# EAGLE board Final_PCB (EAGLE 9.7.0), part 1 of 6
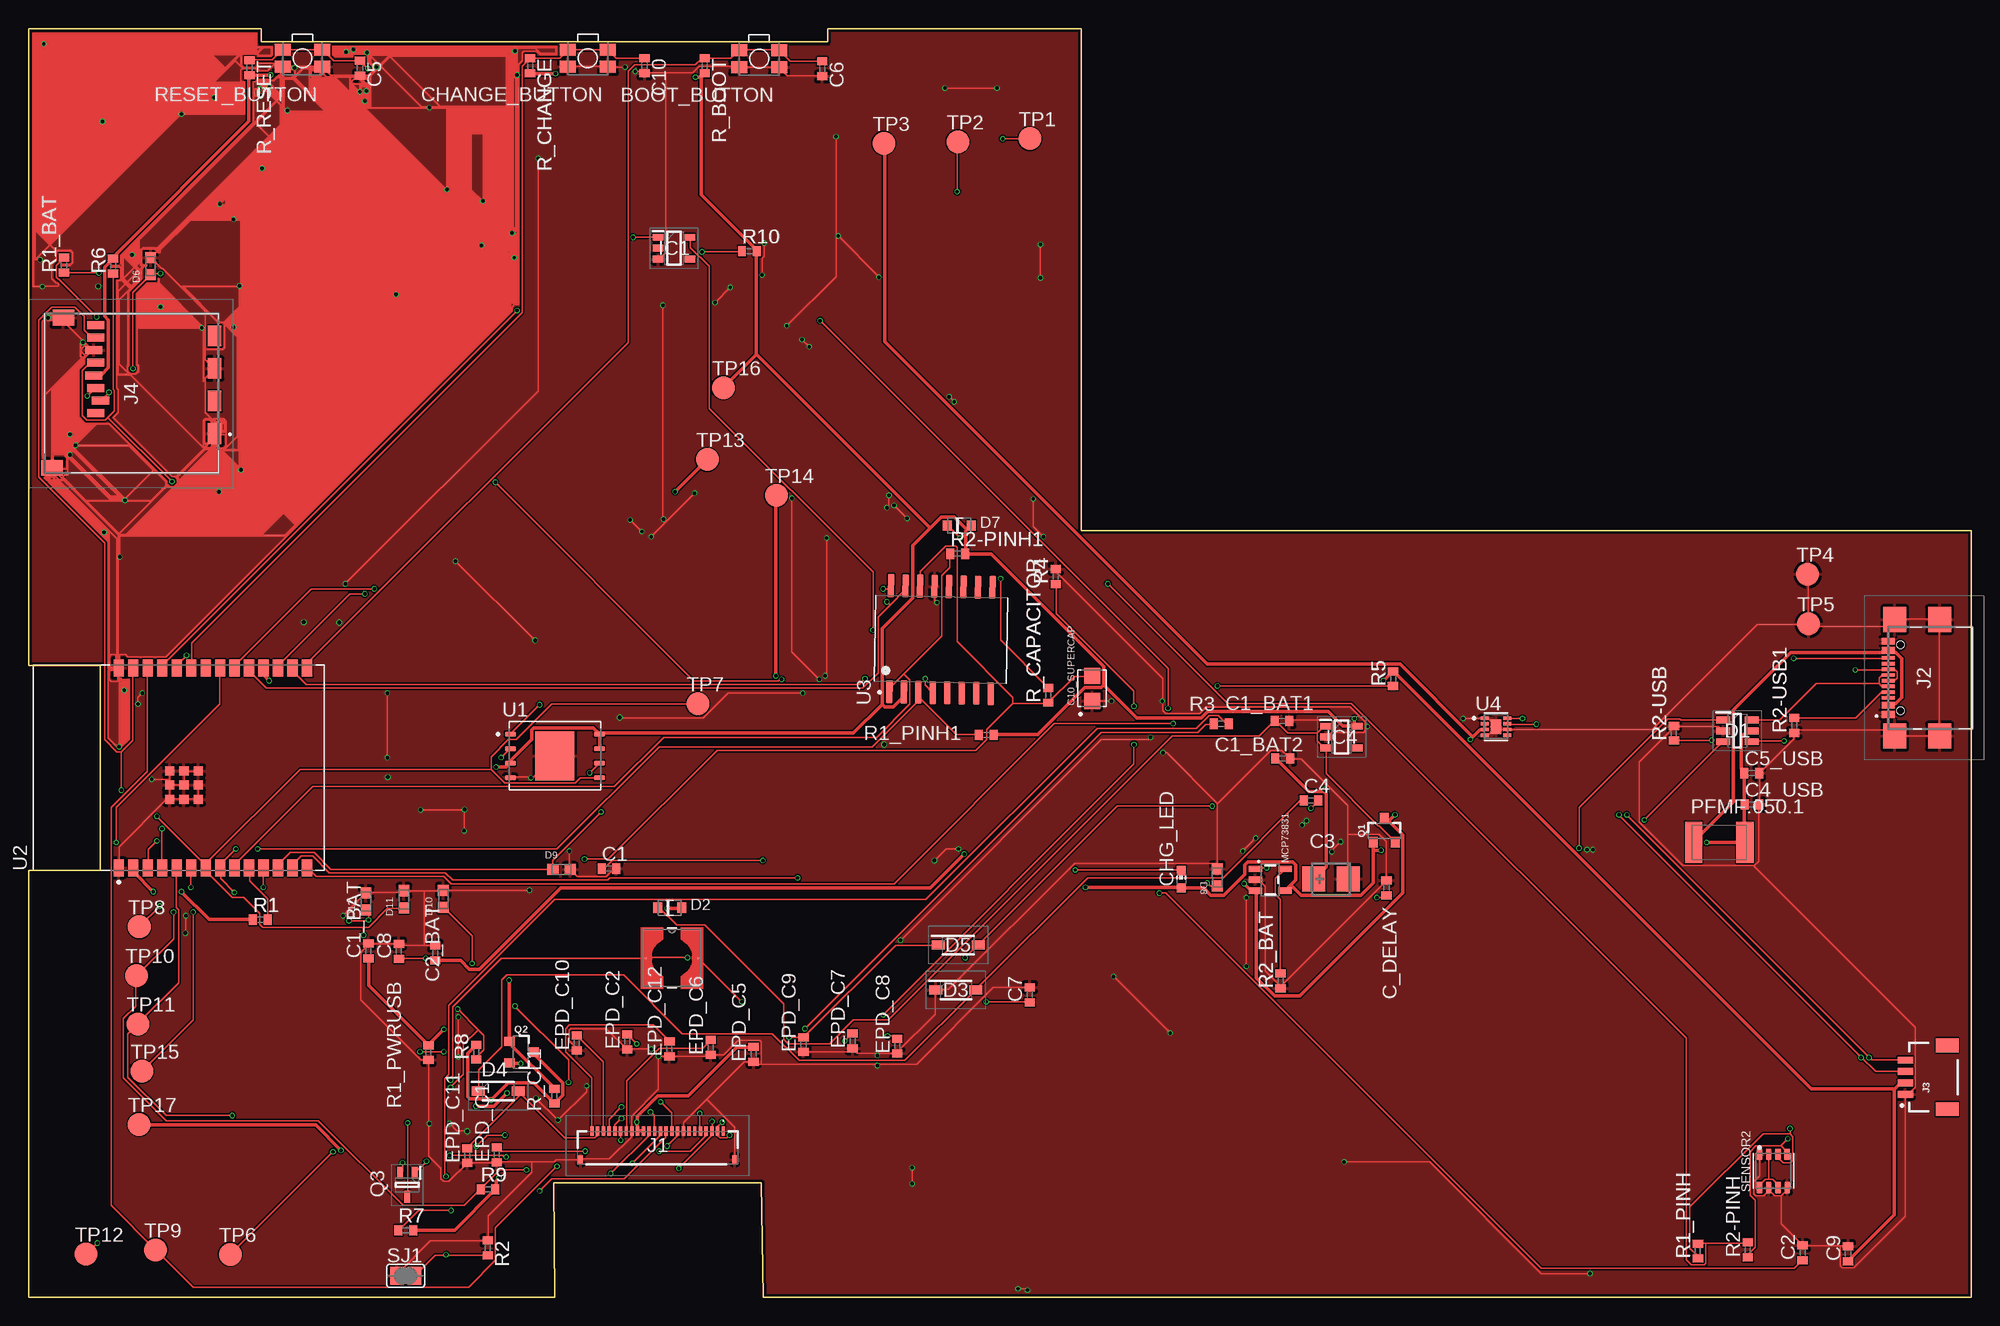
[diagram p0: board, top side]
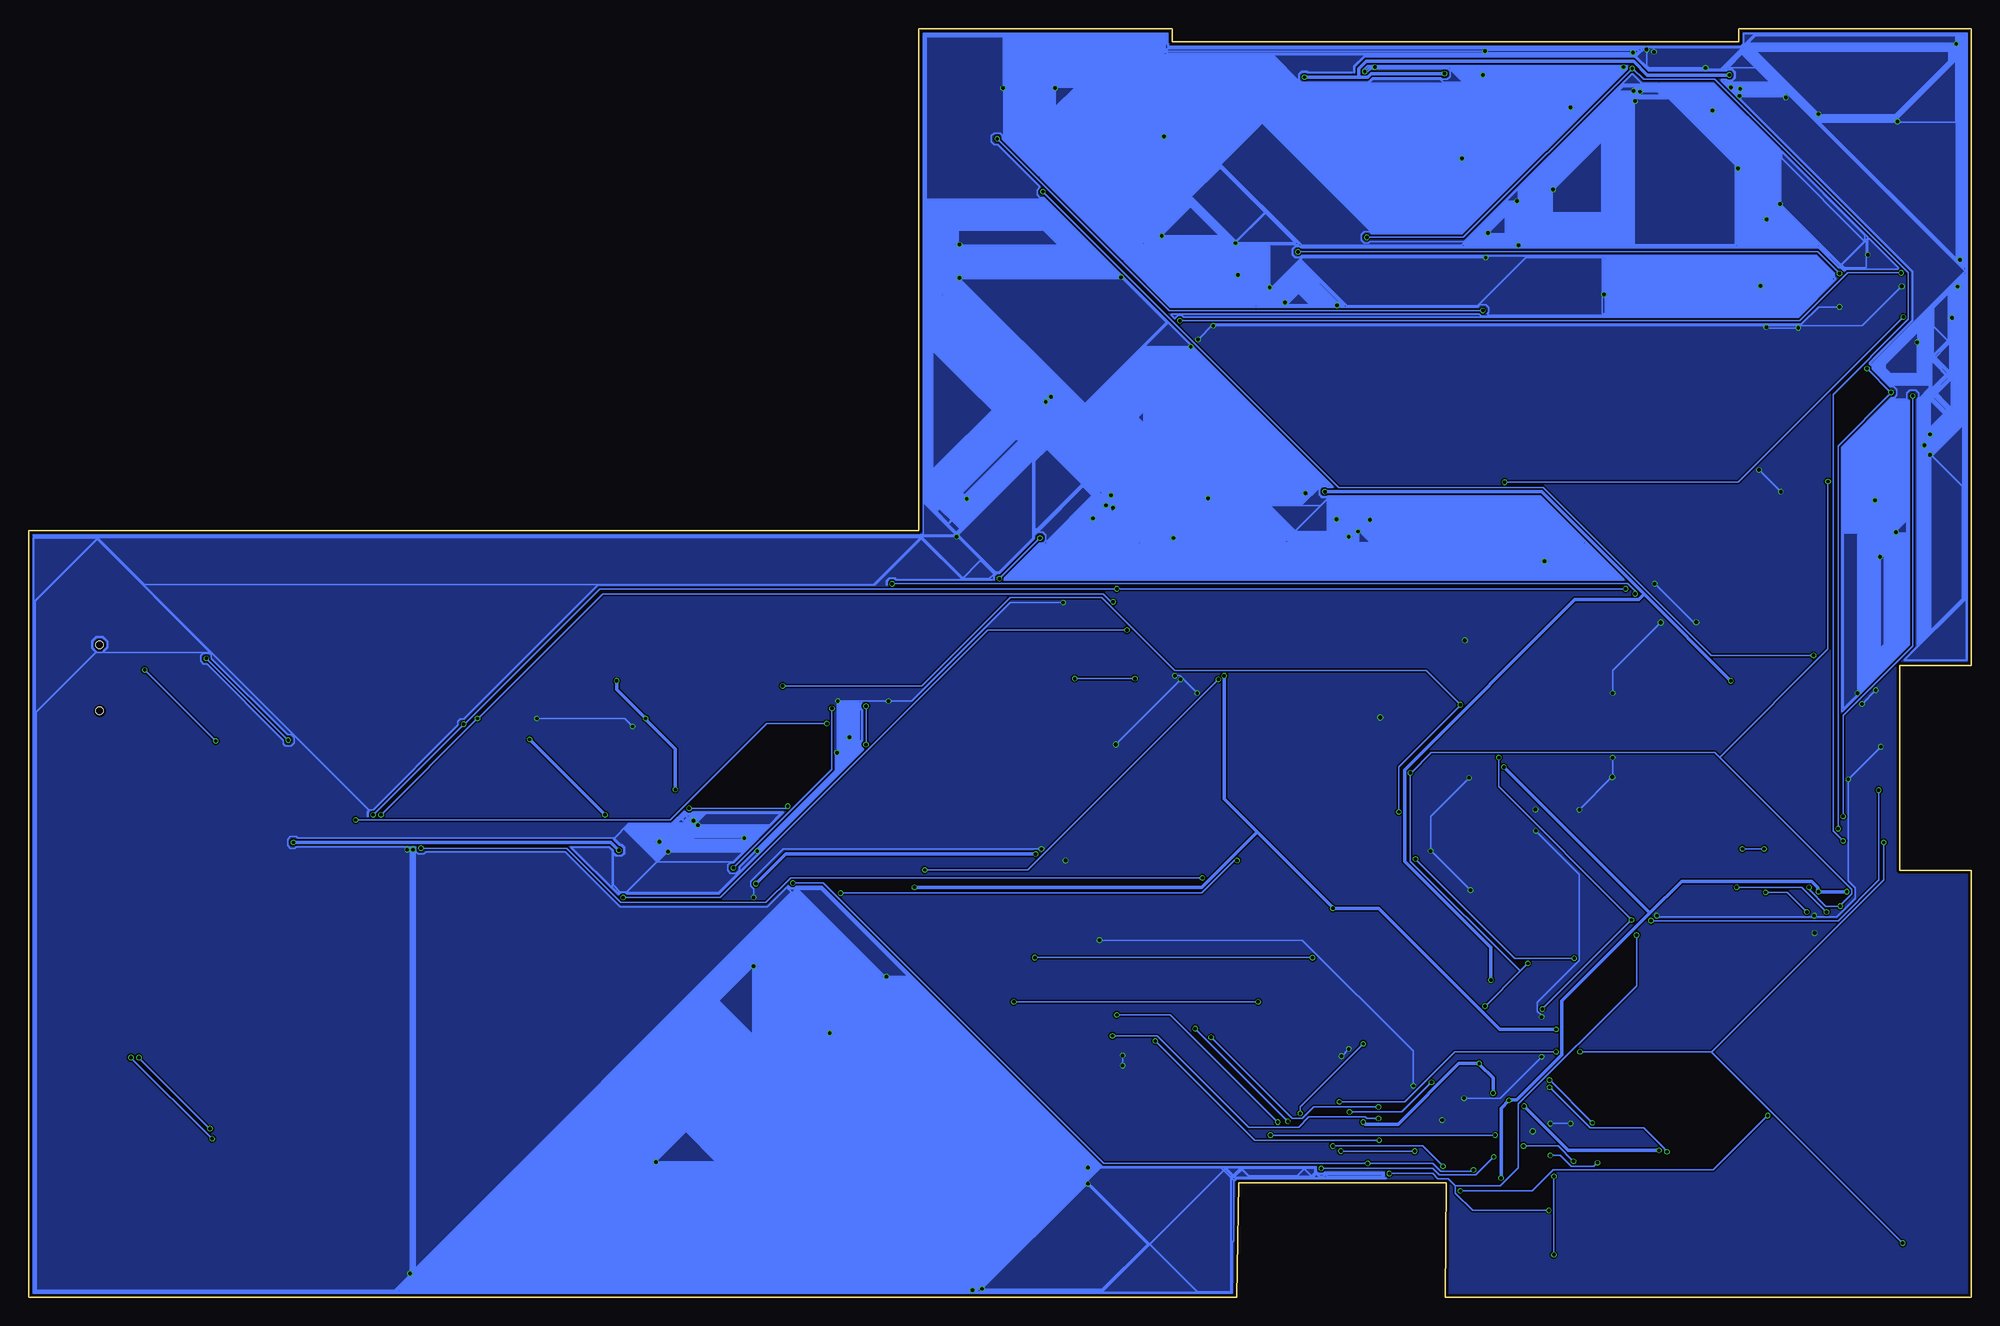
[diagram p1: board, bottom side, seen from below]

Size 170.2 x 111.2 mm. Coordinates in mm from the lower left corner, seen from the top.
Outline: 0,111.2 0,55.4 6.3,55.4 6.3,37.41 0,37.41 0,0 46.09,0 46,10.03 64.2,10.03 64.38,0 170.2,0 170.2,67.2 92.2,67.2 92.2,111.2 70.01,111.2 70.01,110.03 20.4,110.03 20.4,111.2 0,111.2
Copper layers (1*16): Top 0.035mm / dielectric 1.6mm / Bottom 0.035mm
Design rules "jlcpcb-2layers.dru": minimum track width 5mil, minimum drill 0.3mm, track to track 5mil, track to pad 5mil, pad to pad 5mil, via to via 5mil, smd to smd 5mil, copper to edge 0.2mm, drill to drill 6mil, minimum pad ring 10mil, minimum via ring 3mil, stop-mask expansion 4mil, vias tented up to drill 0mil, thermal gap 10mil
Net classes: 1 Power: width 0.3 mm; 2 Rest: width 0.15 mm

## Footprints (pad centres in the part's own frame; a part is rotated, then mirrored left to right if it is on the bottom)
MYBUTTON = smd 1.4 x 1.05: 1 1.75,0.75; 2 -1.75,0.75; 3 -1.75,-0.75; 4 1.75,-0.75
ESP32_WROVER_EAGLE-LTSPICE_C0402 = smd 0.7 x 0.9: 1 -0.65,0; 2 0.65,0
RCL_CT3528 = smd 2 x 2.2: + -1.5,0; - 1.5,0
EAGLE-LTSPICE_C0402 = smd 0.7 x 0.9: 1 -0.65,0; 2 0.65,0
CAPCP3225X100N = smd 1.4 x 1.4: 1 -1.1,0; 2 1.1,0
ADAFRUIT_CHIP-LED0603 = smd 0.8 x 0.8: A 0,-0.75; C 0,0.75
SOT95P280X145-6N = smd 1.2 x 0.6: 1 -1.25,0.95; 2 -1.25,0; 3 -1.25,-0.95; 4 1.25,-0.95; 5 1.25,0; 6 1.25,0.95
ESP32_WROVER_AVX---SD0805S020S1R0_AVX_SD0805S020S1R0_0 = smd 0.8 x 0.9: 1 -1.05,0; 2 1.05,0
SOD3716X135N = smd 1.15 x 0.8: 1 -1.75,0; 2 1.75,0
DIOC1608X36N = smd 0.97 x 0.94: 1 -0.75,0; 2 0.75,0
SOT95P280X125-5N = smd 0.9 x 0.6: 1 -1.4,0.95; 2 -1.4,0; 3 -1.4,-0.95; 4 1.4,-0.95; 5 1.4,0.95
SOT95P280X120-5N = smd 0.9 x 0.6: 1 -1.4,0.95; 2 -1.4,0; 3 -1.4,-0.95; 4 1.4,-0.95; 5 1.4,0.95
FH34SRJ24S05SH99 = smd 0.3 x 0.8: 1 5.75,1.45; 2 5.25,1.45; 3 4.75,1.45; 4 4.25,1.45; 5 3.75,1.45; 6 3.25,1.45; 7 2.75,1.45; 8 2.25,1.45; 9 1.75,1.45; 10 1.25,1.45; 11 0.75,1.45; 12 0.25,1.45; 13 -0.25,1.45; 14 -0.75,1.45; 15 -1.25,1.45; 16 -1.75,1.45; 17 -2.25,1.45; 18 -2.75,1.45; 19 -3.25,1.45; 20 -3.75,1.45; 21 -4.25,1.45; 22 -4.75,1.45; 23 -5.25,1.45; 24 -5.75,1.45 | smd 0.4 x 0.8: MP1 6.75,-1.05; MP2 -6.75,-1.05
SAMACSYS_PARTS_USB4110GFA = smd 0.3 x 1.15: A1 -3.35,3.678; A4 -2.55,3.678; A5 -1.25,3.678; A6 -0.25,3.678; A7 0.25,3.678; A8 1.25,3.678; A9 2.55,3.678; A12 3.35,3.678; B1 3.05,3.678; B4 2.25,3.678; B5 1.75,3.678; B6 0.75,3.678; B7 -0.75,3.678; B8 -1.75,3.678; B9 -2.25,3.678; B12 -3.05,3.678 | smd 2.18 x 2: MP1 -5.11,-0.827; MP2 5.11,-0.827; MP3 -5.11,3.103; MP4 5.11,3.103 | hole 0.65: -2.89,2.603; 2.89,2.603
JST04_1MM_RA = smd 0.6 x 1.35: 1 -1.5,0; 2 -0.5,0; 3 0.5,0; 4 1.5,0 | smd 1.2 x 2: NC1 2.8,-3.675; NC2 -2.8,-3.675
112ATAARR03ATTEND = smd 1.8 x 1.2: G1 10.6,10.4; G2 4.9,10.4; S1 7.75,10.4; S2 2.05,10.4 | smd 1.4 x 1.9: G3 13.6,-3.85; G4 0.45,-2.85 | smd 0.7 x 1.5: P1 8.8,0; P2 7.7,0.4; P3 6.6,0; P4 5.5,-0.2; P5 4.4,0; P6 3.3,-0.2; P7 2.2,0; P8 1.1,0
IND_4828-WE-TPC_WRE = smd 0.127 x 0.127: 1 -2.286,0; 2 2.286,0
ESP32_WROVER_SPARKFUN-IC-POWER_SOT23-5 = smd 0.55 x 1.2: 1 -0.95,-1.3; 2 0,-1.3; 3 0.95,-1.3; 4 0.95,1.3; 5 -0.95,1.3
ESP32C6_VARISTOR_CT/CN1812 = smd 1.5 x 3.6: 1 -2.25,0; 2 2.25,0
ESP32_WROVER_SPARKFUN-DISCRETESEMI_SOT23-3 = smd 0.8 x 0.9: 1 -0.95,-1; 2 0.95,-1; 3 0,1.1
SOT65P210X110-3N = smd 1.05 x 0.5: 1 -1.05,0.65; 2 -1.05,-0.65; 3 1.05,0
ESP32_WROVER_EAGLE-LTSPICE_R0402 = smd 0.7 x 0.9: 1 -0.65,0; 2 0.65,0
ESP32_WROVER_BME680_PSON80P300X300X100-8N = smd 1.016 x 0.5: 1 1.458,1.2; 2 1.458,0.4; 3 1.458,-0.4; 4 1.458,-1.2; 5 -1.458,-1.22; 6 -1.458,-0.4; 7 -1.458,0.4; 8 -1.458,1.2
SJ = smd 1.168 x 1.6: 1 -0.762,0; 2 0.762,0
TP20R = smd 2 x 2: TP 0,0
SON127P600X800X80-9N = smd 0.94 x 0.44: 1 -3.895,1.905; 2 -3.895,0.635; 3 -3.895,-0.635; 4 -3.895,-1.905; 5 3.895,-1.905; 6 3.895,-0.635; 7 3.895,0.635; 8 3.895,1.905 | smd 3.4 x 4.3: 9 0,0
XCVR_ESP32-C6-WROOM-1-N8 = smd 1.5 x 0.9: 1 -8.75,5.26; 2 -8.75,3.99; 3 -8.75,2.72; 4 -8.75,1.45; 5 -8.75,0.18; 6 -8.75,-1.09; 7 -8.75,-2.36; 8 -8.75,-3.63; 9 -8.75,-4.9; 10 -8.75,-6.17; 11 -8.75,-7.44; 12 -8.75,-8.71; 13 -8.75,-9.98; 14 -8.75,-11.25; 15 8.75,-11.25; 16 8.75,-9.98; 17 8.75,-8.71; 18 8.75,-7.44; 19 8.75,-6.17; 20 8.75,-4.9; 21 8.75,-3.63; 22 8.75,-2.36; 23 8.75,-1.09; 24 8.75,0.18; 25 8.75,1.45; 26 8.75,2.72; 27 8.75,3.99; 28 8.75,5.26 | smd 0.8 x 0.8: 29_1 -2.755,0.79; 29_2 -1.505,0.79; 29_3 -0.255,0.79; 29_4 -2.755,-0.46; 29_5 -1.505,-0.46; 29_6 -0.255,-0.46; 29_7 -2.755,-1.71; 29_8 -1.505,-1.71; 29_9 -0.255,-1.71
SOIC127P1032X265-16N = smd 2.05 x 0.59: 1 -4.655,4.445; 2 -4.655,3.175; 3 -4.655,1.905; 4 -4.655,0.635; 5 -4.655,-0.635; 6 -4.655,-1.905; 7 -4.655,-3.175; 8 -4.655,-4.445; 9 4.655,-4.445; 10 4.655,-3.175; 11 4.655,-1.905; 12 4.655,-0.635; 13 4.655,0.635; 14 4.655,1.905; 15 4.655,3.175; 16 4.655,4.445
SON50P200X200X80-9N = smd 0.76 x 0.27: 1 -0.985,0.75; 2 -0.985,0.25; 3 -0.985,-0.25; 4 -0.985,-0.75; 5 0.985,-0.75; 6 0.985,-0.25; 7 0.985,0.25; 8 0.985,0.75 | smd 0.9 x 1.3: 9 0,0

## Placement (x,y rotation side)
BOOT_BUTTON  BUTTON_CUSYOMV1  [MYBUTTON]  64,108.55 180 top
C1  100nF  [ESP32_WROVER_EAGLE-LTSPICE_C0402]  50.85,37.59 0 top
C1_BAT  4.7uF  [ESP32_WROVER_EAGLE-LTSPICE_C0402]  29.77,30.37 90 top
C1_BAT1  4.7uF  [ESP32_WROVER_EAGLE-LTSPICE_C0402]  109.8,50.53 0 top
C1_BAT2  4.7uF  [ESP32_WROVER_EAGLE-LTSPICE_C0402]  109.87,47.24 0 top
C2  100nF  [ESP32_WROVER_EAGLE-LTSPICE_C0402]  155.41,3.92 90 top
C2_BAT  4.7uF  [ESP32_WROVER_EAGLE-LTSPICE_C0402]  35.63,30.19 90 top
C3  100uF  [RCL_CT3528]  114.1,36.67 0 top
C4  4.7uF/25V  [ESP32_WROVER_EAGLE-LTSPICE_C0402]  112.35,43.55 0 top
C4_USB  100nF  [ESP32_WROVER_EAGLE-LTSPICE_C0402]  150.98,43.2 0 top
C5  1uF  [EAGLE-LTSPICE_C0402]  29.04,107.72 270 top
C5_USB  4.7uF  [ESP32_WROVER_EAGLE-LTSPICE_C0402]  150.96,45.95 0 top
C6  100nF  [EAGLE-LTSPICE_C0402]  69.54,107.67 270 top
C7  10uF  [ESP32_WROVER_EAGLE-LTSPICE_C0402]  87.71,26.53 90 top
C8  100nF  [ESP32_WROVER_EAGLE-LTSPICE_C0402]  32.44,30.33 90 top
C9  100nF  [ESP32_WROVER_EAGLE-LTSPICE_C0402]  159.39,3.84 90 top
C10  100nF  [EAGLE-LTSPICE_C0402]  53.96,107.93 270 top
C10_SUPERCAP  CPH3225A  [CAPCP3225X100N]  93.16,53.37 90 top
C_DELAY  100nF  [ESP32_WROVER_EAGLE-LTSPICE_C0402]  118.96,35.9 90 top
CHANGE_BUTTON  BUTTON_CUSYOMV1  [MYBUTTON]  49,108.59 180 top
CHG_LED  [ADAFRUIT_CHIP-LED0603]  100.97,36.65 0 top
D1  USBLC6-2SC6Y  [SOT95P280X145-6N]  149.7,49.66 0 top
D2  ESP32_WROVER_AVX---SD0805S020S1R0_AVX_SD0805S020S1R0_0_0AVX_SD0805S020S1R0_0_0  [ESP32_WROVER_AVX---SD0805S020S1R0_AVX_SD0805S020S1R0_0]  56.18,34.15 0 top
D3  MBR0530  [SOD3716X135N]  81.24,26.94 0 top
D4  MBR0530  [SOD3716X135N]  41.14,18.09 0 top
D5  MBR0530  [SOD3716X135N]  81.44,30.88 0 top
D6  PGB1010603MR  [DIOC1608X36N]  10.69,90.38 90 top
D7  ESP32_WROVER_AVX---SD0805S020S1R0_AVX_SD0805S020S1R0_0_0AVX_SD0805S020S1R0_0_0  [ESP32_WROVER_AVX---SD0805S020S1R0_AVX_SD0805S020S1R0_0]  81.54,67.64 0 top
D8  PGB1010603MR  [DIOC1608X36N]  104.14,36.8 90.1 top
D9  PGB1010603MR  [DIOC1608X36N]  46.69,37.51 0 top
D10  PGB1010603MR  [DIOC1608X36N]  36.34,34.93 90 top
D11  PGB1010603MR  [DIOC1608X36N]  32.89,34.9 90 top
D12  PGB1010603MR  [DIOC1608X36N]  29.56,34.72 90 top
EPD_C1  1uF/50V  [EAGLE-LTSPICE_C0402]  41.02,12.51 90 top
EPD_C2  1uF/50V  [EAGLE-LTSPICE_C0402]  52.44,22.41 90 top
EPD_C5  0.1uF/50V  [EAGLE-LTSPICE_C0402]  63.51,21.31 90 top
EPD_C6  1uF/50V  [EAGLE-LTSPICE_C0402]  59.76,21.91 90 top
EPD_C7  1uF/50V  [EAGLE-LTSPICE_C0402]  72.19,22.49 90 top
EPD_C8  1uF/50V  [EAGLE-LTSPICE_C0402]  76.11,22.02 90 top
EPD_C9  1uF/50V  [EAGLE-LTSPICE_C0402]  67.88,22.16 90 top
EPD_C10  1uF/50V  [EAGLE-LTSPICE_C0402]  48.03,22.31 90 top
EPD_C11  1uF/50V  [EAGLE-LTSPICE_C0402]  38.44,12.44 90 top
EPD_C12  1uF/50V  [EAGLE-LTSPICE_C0402]  56.14,21.77 90 top
IC1  BD5229G-TR  [SOT95P280X125-5N]  56.54,91.95 0 top
IC4  XC6220A331MR-G  [SOT95P280X120-5N]  115.02,49.1 0 top
J1  FH34SRJ-24S-0.5SH_99_  [FH34SRJ24S05SH99]  55.11,13.13 0 top
J2  SAMACSYS_PARTS_USB4110-GF-A  [SAMACSYS_PARTS_USB4110GFA]  166.58,54.3 90 top
J3  QWIIC_RIGHT_ANGLE  [JST04_1MM_RA]  164.41,19.3 90 top
J4  112A-TAAR-R03_ATTEND  [112ATAARR03ATTEND]  5.9,86.3 270 top
L1  68uH  [IND_4828-WE-TPC_WRE]  56.37,29.75 0 top
MCP73831  ESP32_WROVER_SPARKFUN-IC-POWER_MCP73831  [ESP32_WROVER_SPARKFUN-IC-POWER_SOT23-5]  108.77,36.6 270 top
PFMF.050.1  ESP32C6_VARISTORCN1812  [ESP32C6_VARISTOR_CT/CN1812]  148.11,39.88 0 top
Q1  20V/4.2A/52mΩ/1.4W  [ESP32_WROVER_SPARKFUN-DISCRETESEMI_SOT23-3]  118.76,40.89 0 top
Q2  20V/4.2A/52mΩ/1.4W  [ESP32_WROVER_SPARKFUN-DISCRETESEMI_SOT23-3]  43.13,21.5 270 top
Q3  SI1308EDL-T1-GE3  [SOT65P210X110-3N]  33.18,9.85 270 top
R1  10K  [ESP32_WROVER_EAGLE-LTSPICE_R0402]  20.31,33.1 0 top
R1_BAT  200  [ESP32_WROVER_EAGLE-LTSPICE_R0402]  3.1,90.46 90 top
R1_PINH  10k  [ESP32_WROVER_EAGLE-LTSPICE_R0402]  146.23,4.07 90 top
R1_PINH1  10K  [ESP32_WROVER_EAGLE-LTSPICE_R0402]  83.9,49.3 0 top
R1_PWRUSB  100K  [ESP32_WROVER_EAGLE-LTSPICE_R0402]  35.03,21.46 90 top
R2  2.2  [ESP32_WROVER_EAGLE-LTSPICE_R0402]  40.23,4.35 270 top
R2-PINH  10k  [ESP32_WROVER_EAGLE-LTSPICE_R0402]  150.6,4.17 90 top
R2-PINH1  10K  [ESP32_WROVER_EAGLE-LTSPICE_R0402]  81.4,65.18 0 top
R2-USB  5k1  [ESP32_WROVER_EAGLE-LTSPICE_R0402]  144.14,49.45 90 top
R2-USB1  5k1  [ESP32_WROVER_EAGLE-LTSPICE_R0402]  154.68,50.12 90 top
R2_BAT  2K  [ESP32_WROVER_EAGLE-LTSPICE_R0402]  109.68,27.75 90 top
R3  0.47  [ESP32_WROVER_EAGLE-LTSPICE_R0402]  104.47,50.28 0 top
R4  10K  [ESP32_WROVER_EAGLE-LTSPICE_R0402]  89.98,63.19 90 top
R5  10K  [ESP32_WROVER_EAGLE-LTSPICE_R0402]  119.54,54.22 90 top
R6  10K  [ESP32_WROVER_EAGLE-LTSPICE_R0402]  7.41,90.39 90 top
R7  10K  [ESP32_WROVER_EAGLE-LTSPICE_R0402]  33.05,5.89 0 top
R8  10K  [ESP32_WROVER_EAGLE-LTSPICE_R0402]  39.22,21.5 90 top
R9  10K  [ESP32_WROVER_EAGLE-LTSPICE_R0402]  40.25,9.48 0 top
R10  10K  [ESP32_WROVER_EAGLE-LTSPICE_R0402]  63.15,91.69 0 top
R_BOOT  10K  [ESP32_WROVER_EAGLE-LTSPICE_R0402]  59.24,107.93 270 top
R_CAPACITOR  15  [ESP32_WROVER_EAGLE-LTSPICE_R0402]  89.32,52.77 90 top
R_CHANGE  10K  [ESP32_WROVER_EAGLE-LTSPICE_R0402]  43.94,107.93 270 top
R_CL1  10K  [ESP32_WROVER_EAGLE-LTSPICE_R0402]  46.07,17.65 90 top
R_RESET  10K  [ESP32_WROVER_EAGLE-LTSPICE_R0402]  19.36,107.76 270 top
RESET_BUTTON  BUTTON_CUSYOMV1  [MYBUTTON]  24,108.59 180 top
SENSOR2  ESP32_WROVER_BME680_BME680  [ESP32_WROVER_BME680_PSON80P300X300X100-8N]  152.84,11.09 90 top
SJ1  [SJ]  33.04,1.9 0 top
TP1  TPTP20R  [TP20R]  87.72,101.55 0 top
TP2  TPTP20R  [TP20R]  81.41,101.27 0 top
TP3  TPTP20R  [TP20R]  74.94,101.13 0 top
TP4  TPTP20R  [TP20R]  155.85,63.37 0 top
TP5  TPTP20R  [TP20R]  155.94,59.03 0 top
TP6  TPTP20R  [TP20R]  17.68,3.76 0 top
TP7  TPTP20R  [TP20R]  58.64,52.03 0 top
TP8  TPTP20R  [TP20R]  9.7,32.48 0 top
TP9  TPTP20R  [TP20R]  11.13,4.16 0 top
TP10  TPTP20R  [TP20R]  9.47,28.22 0 top
TP11  TPTP20R  [TP20R]  9.58,23.97 0 top
TP12  TPTP20R  [TP20R]  5.05,3.8 0 top
TP13  TPTP20R  [TP20R]  59.47,73.43 0 top
TP14  TPTP20R  [TP20R]  65.51,70.29 0 top
TP15  TPTP20R  [TP20R]  9.93,19.82 0 top
TP16  TPTP20R  [TP20R]  60.87,79.73 0 top
TP17  TPTP20R  [TP20R]  9.69,15.16 0 top
U1  W25Q512JVEIQ  [SON127P600X800X80-9N]  46.11,47.46 0 top
U2  ESP32-C6-WROOM-1-N8  [XCVR_ESP32-C6-WROOM-1-N8]  13.15,46.41 90 top
U3  DS3231SN#  [SOIC127P1032X265-16N]  79.93,57.65 89 top
U4  MAX17048G+T10  [SON50P200X200X80-9N]  128.55,50.02 0 top

## Library data of the parts
BOOT_BUTTON CHANGE_BUTTON CHG_LED PFMF.050.1 RESET_BUTTON SJ1 TP1-TP17 = DeskAssistant v19 v1
C1 C1_BAT C1_BAT1 C1_BAT2 C2 C2_BAT C4 C4_USB C5 C5_USB C6-C10 C_DELAY EPD_C1 EPD_C2 EPD_C5-EPD_C12 = DeskAssistant v19 v1; SPICEMODEL: NONE; SPICEPREFIX: C
C3 = DeskAssistant v19 v1; SPICEPREFIX: C
C10_SUPERCAP = DeskAssistant v19 v1; AVAILABILITY: Not in stock; CHECK_PRICES: https://www.snapeda.com/parts/CPH3225A/Seiko+Instruments/view-part/?ref=eda; DESCRIPTION: 11 mF (EDLC) Supercapacitor 3.3 V 1210 (3225 Metric) - -; MF: Seiko Instruments; MP: CPH3225A; PACKAGE: 1210 Seiko; PRICE: None; PURCHASE-URL: https://www.snapeda.com/api/url_track_click_mouser/?unipart_id=562593&manufacturer=Seiko Instruments&part_name=CPH3225A&search_term=None; SNAPEDA_LINK: https://www.snapeda.com/parts/CPH3225A/Seiko+Instruments/view-part/?ref=snap
D1 = DeskAssistant v19 v1; AVAILABILITY: In Stock; CHECK_PRICES: https://www.snapeda.com/parts/USBLC6-2SC6Y/STMicroelectronics/view-part/?ref=eda; DESCRIPTION: 17V Clamp 5A (8/20µs) Ipp Tvs Diode Surface Mount SOT-23-6; MF: STMicroelectronics; MP: USBLC6-2SC6Y; PACKAGE: SOT-23-6 STMicroelectronics; PRICE: None; SNAPEDA_LINK: https://www.snapeda.com/parts/USBLC6-2SC6Y/STMicroelectronics/view-part/?ref=snap
D2 D7 = DeskAssistant v19 v1; CENTROID_NOT_SPECIFIED: No; DATASHEET: http://datasheets.avx.com/schottky.pdf; DIGIKEY_DESCRIPTION: DIODE SCHOTTKY 20V 1A 0805; DIGIKEY_PART_NUMBER: 478-7800-1-ND; LEAD_FREE: yes; MF: AVX; MOUSER_PART_NUMBER: 581-SD0805S020S1R0; PACKAGE: 0805 (2012 metric); PREFIX: D; ROHS: yes; TEMPERATURE_RANGE_HIGH: +125°C; TEMPERATURE_RANGE_LOW: -55°C
D3-D5 = DeskAssistant v19 v1; AVAILABILITY: In Stock; CHECK_PRICES: https://www.snapeda.com/parts/MBR0530/Onsemi/view-part/?ref=eda; DESCRIPTION: Diode Schottky 30 V 500mA Surface Mount SOD-123; MF: ON Semiconductor; MP: MBR0530; PACKAGE: SOD-123-2 ON Semiconductor; PRICE: None; PURCHASE-URL: https://www.snapeda.com/api/url_track_click_mouser/?unipart_id=179458&manufacturer=ON Semiconductor&part_name=MBR0530&search_term=None; SNAPEDA_LINK: https://www.snapeda.com/parts/MBR0530/Onsemi/view-part/?ref=snap
D6 D8-D12 = DeskAssistant v19 v1; AVAILABILITY: In Stock; CHECK_PRICES: https://www.snapeda.com/parts/PGB1010603MR/Littelfuse/view-part/?ref=eda; DESCRIPTION: 150V (Typ) Clamp - Ipp Tvs Diode Surface Mount 0603 (1608 Metric); MF: Littelfuse Inc.; MP: PGB1010603MR; PACKAGE: 0603 Littelfuse Inc.; PRICE: None; PURCHASE-URL: https://www.snapeda.com/api/url_track_click_mouser/?unipart_id=5659453&manufacturer=Littelfuse Inc.&part_name=PGB1010603MR&search_term=None; SNAPEDA_LINK: https://www.snapeda.com/parts/PGB1010603MR/Littelfuse/view-part/?ref=snap
IC1 = DeskAssistant v19 v1; DESCRIPTION: Voltage Detector with Adjustable Delay Time: CMOS processes are utilized to develop high precision, low current consumption CMOS reset ICs that allow arbitrary setting of the delay time. The extensive lineup includes both Nch Open Drain and CMOS output types in a wide range of detection voltages (from 2.3V to 6.0V, in 0.1V steps), enabling selection of the ideal solution based on customer requirements. In addition, the entire series is of course both lead-free and RoHS-compliant.; HEIGHT: 1.25mm; MANUFACTURER_NAME: ROHM Semiconductor; MANUFACTURER_PART_NUMBER: BD5229G-TR; MOUSER_PART_NUMBER: 755-BD5229G-TR; MOUSER_PRICE-STOCK: https://www.mouser.co.uk/ProductDetail/ROHM-Semiconductor/BD5229G-TR?qs=4kLU8WoGk0vvnhrrYwdszw%3D%3D
IC4 = DeskAssistant v19 v1; DESCRIPTION: LDO Voltage Regulators; HEIGHT: 1.2mm; MANUFACTURER_NAME: Torex; MANUFACTURER_PART_NUMBER: XC6220A331MR-G; MOUSER_PART_NUMBER: 865-XC6220A331MR-G; MOUSER_PRICE-STOCK: https://www.mouser.co.uk/ProductDetail/Torex-Semiconductor/XC6220A331MR-G?qs=AsjdqWjXhJ8ZSWznL1J0gg%3D%3D
J1 = DeskAssistant v19 v1; DESCRIPTION: 24 Position FFC, FPC Connector Contacts, Top and Bottom 0.020" (0.50mm) Surface Mount, Right Angle; HEIGHT: 1.1mm; MANUFACTURER_NAME: Hirose; MANUFACTURER_PART_NUMBER: FH34SRJ-24S-0.5SH(99); MOUSER_PART_NUMBER: 798-FH34SRJ24S05SH99; MOUSER_PRICE-STOCK: https://www.mouser.co.uk/ProductDetail/Hirose-Connector/FH34SRJ-24S-0.5SH99?qs=vcbW%252B4%252BSTIpKBl5ap9J8Fw%3D%3D
J2 = DeskAssistant v19 v1; DESCRIPTION: CONN USB 2.0 TYPE-C R/A SMT; HEIGHT: 3.26mm; MANUFACTURER_NAME: GCT (GLOBAL CONNECTOR TECHNOLOGY); MANUFACTURER_PART_NUMBER: USB4110-GF-A; MOUSER_PART_NUMBER: 640-USB4110-GF-A; MOUSER_PRICE-STOCK: https://www.mouser.co.uk/ProductDetail/GCT/USB4110-GF-A?qs=KUoIvG%2F9IlYiZvIXQjyJeA%3D%3D
J3 = DeskAssistant v19 v1; PROD_ID: CONN-13694
J4 = DeskAssistant v19 v1; DESCRIPTION: Micro SD Card Socket, Push-Push Type, Top Mount, SMT, H=1.83mm, 10u; HEIGHT: 1.9mm; MANUFACTURER_NAME: ATTEND; MANUFACTURER_PART_NUMBER: 112A-TAAR-R03 ATTEND
L1 = DeskAssistant v19 v1; COPYRIGHT: Copyright (C) 2024 Ultra Librarian. All rights reserved.; MANUFACTURER_PART_NUMBER: 744043680; MFR_NAME: Wurth Electronics
MCP73831 = DeskAssistant v19 v1; PROD_ID: IC-09995
Q1 Q2 = DeskAssistant v19 v1; PROD_ID: TRAN-14388
Q3 = DeskAssistant v19 v1; AVAILABILITY: In Stock; CHECK_PRICES: https://www.snapeda.com/parts/SI1308EDL-T1-GE3/Vishay+Siliconix/view-part/?ref=eda; DESCRIPTION: Si1308EDL-T1-GE3 N-channel MOSFET Transistor, 1.5 A, 30 V, 3-Pin SC-70 | Siliconix / Vishay SI1308EDL-T1-GE3; MF: Vishay Siliconix; MP: SI1308EDL-T1-GE3; PACKAGE: SOT-323 Vishay Semiconductor; PRICE: None; PURCHASE-URL: https://www.snapeda.com/api/url_track_click_mouser/?unipart_id=274603&manufacturer=Vishay Siliconix&part_name=SI1308EDL-T1-GE3&search_term=None; SNAPEDA_LINK: https://www.snapeda.com/parts/SI1308EDL-T1-GE3/Vishay+Siliconix/view-part/?ref=snap
R1 R1_BAT R1_PINH R1_PINH1 R1_PWRUSB R2 R2-PINH R2-PINH1 R2-USB R2-USB1 R2_BAT R3-R10 R_BOOT R_CAPACITOR R_CHANGE R_CL1 R_RESET = DeskAssistant v19 v1; SPICEMODEL: NONE; SPICEPREFIX: R
SENSOR2 = DeskAssistant v19 v1; AVAILABILITY: Unavailable; DESCRIPTION: Integrated Environmental Unit; MF: Bosch Sensortec; MP: BME680; PACKAGE: LGA-8 Bosch Tools; PRICE: None
U1 = DeskAssistant v19 v1; AVAILABILITY: In Stock; CHECK_PRICES: https://www.snapeda.com/parts/W25Q512JVEIQ/Winbond+Electronics/view-part/?ref=eda; DESCRIPTION: FLASH - NOR Memory IC 512Mb (64M x 8) SPI - Quad I/O 133 MHz 8-WSON (8x6); MF: Winbond Electronics; MP: W25Q512JVEIQ; PACKAGE: Package; PRICE: None; SNAPEDA_LINK: https://www.snapeda.com/parts/W25Q512JVEIQ/Winbond+Electronics/view-part/?ref=snap
U2 = DeskAssistant v19 v1; AVAILABILITY: In Stock; CHECK_PRICES: https://www.snapeda.com/parts/ESP32-C6-WROOM-1-N8/Espressif+Systems/view-part/?ref=eda; DESCRIPTION: Multiprotocol Modules ESP32-C6 module, Wi-Fi 6 in 2.4 GHz band, Bluetooth 5, Zigbee 3.0 and Thread. ESP34-WROOM Compatible - ENGINEERING SAMPLE; MF: Espressif Systems; MP: ESP32-C6-WROOM-1-N8; PACKAGE: None; PRICE: None; SNAPEDA_LINK: https://www.snapeda.com/parts/ESP32-C6-WROOM-1-N8/Espressif+Systems/view-part/?ref=snap
U3 = DeskAssistant v19 v1; AVAILABILITY: In Stock; CHECK_PRICES: https://www.snapeda.com/parts/DS3231SN%23/Analog+Devices/view-part/?ref=eda; DESCRIPTION: Extremely Accurate I²C-Integrated RTC/TCXO/Crystal; MF: Analog Devices; MP: DS3231SN#; PACKAGE: SOIC-16 Maxim; PRICE: None; PURCHASE-URL: https://www.snapeda.com/api/url_track_click_mouser/?unipart_id=99048&manufacturer=Analog Devices&part_name=DS3231SN#&search_term=None; SNAPEDA_LINK: https://www.snapeda.com/parts/DS3231SN%23/Analog+Devices/view-part/?ref=snap
U4 = DeskAssistant v19 v1; AVAILABILITY: In Stock; CHECK_PRICES: https://www.snapeda.com/parts/MAX17048G+T10/Analog+Devices/view-part/?ref=eda; DESCRIPTION: 3µA 1-Cell/2-Cell Fuel Gauge with ModelGauge; MF: Analog Devices; MP: MAX17048G+T10; PACKAGE: TDFN-8 Maxim; PRICE: None; PURCHASE-URL: https://www.snapeda.com/api/url_track_click_mouser/?unipart_id=329239&manufacturer=Analog Devices&part_name=MAX17048G+T10&search_term=None; SNAPEDA_LINK: https://www.snapeda.com/parts/MAX17048G+T10/Analog+Devices/view-part/?ref=snap

## Nets
3V3 [Power]: C1_BAT2.1 C3.+ C9.1 D7.2 IC4.5 J3.2 J4.P4 Q2.3 R1.1 R1_PINH1.2 R2-PINH1.2 R5.2 R6.2 R7.2 R8.2 R9.2 R10.2 R_BOOT.2 R_CHANGE.2 R_CL1.1 R_RESET.2 TP16.TP U1.3 U1.7 U1.8 U2.2 U3.2
32KHZ [Rest]: R2-PINH1.1 U2.9 U3.1
DN [Rest]: D1.6 J2.A7 J2.B7
DP [Rest]: D1.4 J2.A6 J2.B6
EDP_3V3: C7.1 L1.2
EPD_3V3 [Power]: EPD_C5.2 J1.15 J1.16 Q2.2 TP17.TP
EPD_3V3_C [Power]: Q2.1 R_CL1.2 TP13.TP U2.18
EPD_BUSY [Rest]: J1.9 TP9.TP U2.26
EPD_CS [Rest]: D8.1 J1.12 R9.1 TP10.TP U2.11
EPD_DC [Rest]: J1.11 TP11.TP U2.5
EPD_RST [Rest]: J1.10 TP12.TP U2.21
FLASH_CS [Rest]: D9.1 R5.1 U1.1 U2.12
GDR [Rest]: J1.2 Q3.1 R4.1
GND [Rest]: BOOT_BUTTON.1 BOOT_BUTTON.2 C1.2 C1_BAT1.2 C1_BAT2.2 C1_BAT.2 C2.2 C2_BAT.2 C3.- C4_USB.2 C5.2 C5_USB.2 C6.2 C7.2 C8.2 C9.2 C10.2 C10_SUPERCAP.1 C_DELAY.2 CHANGE_BUTTON.1 CHANGE_BUTTON.2 D1.2 D3.1 D6.2 D8.2 D9.2 D10.2 D11.2 D12.2 EPD_C1.1 EPD_C2.1 EPD_C5.1 EPD_C6.1 EPD_C7.1 EPD_C8.1 EPD_C9.1 EPD_C10.1 EPD_C11.1 EPD_C12.1 IC1.3 IC4.2 J1.8 J1.17 J1.MP1 J1.MP2 J2.A1 J2.A12 J2.B1 J2.B12 J2.MP1 J2.MP2 J2.MP3 J2.MP4 J3.1 J4.G1 J4.G2 J4.G3 J4.G4 J4.P6 MCP73831.2 R1_PWRUSB.1 R2-USB1.1 R2-USB.2 R2.1 R2_BAT.1 R4.2 RESET_BUTTON.1 RESET_BUTTON.2 SENSOR2.1 SENSOR2.5 SENSOR2.7 SJ1.1 TP4.TP TP5.TP U1.4 U1.9 U2.1 U2.28 U2.29_1 U2.29_2 U2.29_3 U2.29_4 U2.29_5 U2.29_6 U2.29_7 U2.29_8 U2.29_9 U3.13 U4.1 U4.4 U4.6 U4.9
GPIO8 [Rest]: R1.2 U2.10
I2C_PW [Rest]: R1_PINH.2 R2-PINH.2 U2.17
IC2_PW [Rest]: C1.1 C2.1
INT_RTC [Rest]: R1_PINH1.1 TP15.TP U2.8 U3.3
IO/BOOT [Rest]: BOOT_BUTTON.3 BOOT_BUTTON.4 C6.1 R_BOOT.1 U2.15
IO/CHANGE [Rest]: C10.1 CHANGE_BUTTON.3 CHANGE_BUTTON.4 R_CHANGE.1 U2.23
MISO [Rest]: D12.1 J4.P7 R8.1 TP6.TP U1.2 U2.27
MOSI [Rest]: D11.1 J1.14 J4.P3 R7.1 TP7.TP U1.5 U2.7
N$1 [Rest]: EPD_C10.2 J1.22
N$2 [Rest]: C1_BAT1.1 D2.1 IC4.1 IC4.3 Q1.2
N$3 [Rest]: MCP73831.5 R2_BAT.2
N$4 [Rest]: EPD_C8.2 J1.20
N$5 [Rest]: J2.B5 R2-USB.1
N$6 [Rest]: C4.1 D3.2 D4.1
N$7 [Rest]: MCP73831.1 R1_BAT.1
N$8 [Rest]: CHG_LED.C R1_BAT.2
N$9 [Rest]: EPD_C7.2 J1.19
N$10 [Rest]: J2.A5 R2-USB1.2
N$11 [Rest]: EPD_C6.2 J1.18
N$12 [Rest]: EPD_C12.2 J1.24
N$13 [Rest]: D7.1 R_CAPACITOR.2
N$14 [Rest]: EPD_C2.2 J1.5
N$15 [Rest]: EPD_C1.2 J1.4
N$17 [Rest]: SENSOR2.2 SENSOR2.6 SENSOR2.8
N$21 [Rest]: C_DELAY.1 IC1.5
PREVGH [Rest]: D5.1 EPD_C9.2 J1.21
PREVGL [Rest]: D4.2 EPD_C11.2 J1.23
RESE [Rest]: J1.3 Q3.2 R3.1
RESE' [Rest]: R2.2 R3.2 SJ1.2
RESET [Rest]: C5.1 IC1.1 R_RESET.1 RESET_BUTTON.3 RESET_BUTTON.4 U2.3
RTC_RST [Rest]: U2.16 U3.4
RX [Rest]: TP2.TP U2.24
SCK [Rest]: D10.1 J1.13 J4.P5 R6.1 TP8.TP U1.6 U2.6
SCL [Rest]: J3.4 R2-PINH.1 SENSOR2.4 U2.20 U3.16 U4.7
SDA [Rest]: J3.3 R1_PINH.1 SENSOR2.3 U2.19 U3.15 U4.8
SRC [Rest]: C4.2 D5.2 L1.1 Q3.3
SS_SD [Rest]: D6.1 J4.P2 R10.1 U2.4
TX [Rest]: TP1.TP U2.25
USB_D+ [Rest]: D1.3 U2.14
USB_D- [Rest]: D1.1 U2.13
VBAT [Power]: C2_BAT.1 MCP73831.3 Q1.3 TP3.TP U4.2 U4.3
VBUS [Power]: C1_BAT.1 C4_USB.1 C5_USB.1 CHG_LED.A D1.5 D2.2 MCP73831.4 PFMF.050.1.2 Q1.1 R1_PWRUSB.2 TP14.TP
VRTC [Rest]: C8.1 C10_SUPERCAP.2 R_CAPACITOR.1 U3.14
VUSB [Power]: J2.A4 J2.A9 J2.B4 J2.B9 PFMF.050.1.1

## Tracks (layer width: path | path; a pad name or v marks a point on that pad's centre or on a via)
3V3  (via drill 0.3)
  Top 0.3: J4.P4 5.71,80.83 6.35,80.83 6.99,81.47 6.99,85.66 6.67,85.98 6.67,90.3 7.37,91 R6.2 7.43,91.19 19.3,103.06 19.3,107.06 R_RESET.2 19.49,107.12 v21.21,107.12 | v46.16,107.25 43.94,107.25 R_CHANGE.2 | 58.86,106.93 v58.42,106.93 | 58.86,106.93 59.18,107.25 R_BOOT.2 | 63.75,82.61 63.75,91.63 R10.2 63.75,91.82 58.93,96.65 58.93,106.81 58.86,106.93 | 63.75,82.61 60.9,79.76 TP16.TP | v13.4,35.56 15.81,33.15 19.62,33.15 R1.1 | v10.92,35.56 9.21,37.27 9.21,37.66 U2.2 | R7.2 33.72,5.91 37.34,5.91 40.89,9.46 R9.2 40.96,9.59 40.96,10.22 v41.21,10.48 | Q2.3 44.26,21.46 44.26,21.34 46.8,18.8 46.8,17.72 46.1,17.02 R_CL1.1 45.97,17.08 44.26,18.8 42.04,18.8 40.64,17.4 40.51,17.4 | 40.51,17.4 38.67,17.4 38.48,17.59 38.48,21.4 39.18,22.1 R8.2 | v40.51,17.27 40.51,17.4 | 163.45,18.22 163.45,7.24 159.45,3.24 C9.1 | 163.45,18.22 164.02,18.8 J3.2 | 113.47,44.32 112.14,44.32 109.28,47.18 C1_BAT2.1 | 113.47,44.32 113.67,44.13 113.67,37.72 112.65,36.7 C3.+ | U1.8 49.97,49.4 49.47,49.91 44.26,49.91 44.07,49.72 44.07,48.9 42.23,47.05 42.23,46.86 U1.3 42.1,46.74 41.85,46.48 v40.96,46.48 | U1.7 50.04,48.13 50.04,49.21 U1.8 | 82.2,67.28 82.55,67.63 D7.2 | 82.2,67.28 82.11,67.18 82.11,65.22 R2-PINH1.2 82.23,65.15 84.33,65.15 94.17,55.31 94.17,53.66 | 94.17,53.66 93.98,53.47 92.52,53.47 88.39,49.34 84.58,49.34 R1_PINH1.2 | 94.17,53.66 94.3,53.59 97.09,50.8 102.74,50.8 103.31,51.37 113.86,51.37 115.13,50.1 116.39,50.1 IC4.5 116.14,50.23 v116.14,50.74 | v118.68,54.04 119.51,54.86 R5.2 119.63,54.8 156.15,18.29 163.32,18.29 163.45,18.22 | 74.8,51.94 74.99,51.75 75.75,51.75 76.64,52.64 76.64,53.02 U3.2
  Top 0.3: 74.8,51.94 74.8,58.61 77.47,61.28 77.47,65.91 78.99,67.44 | 78.99,67.44 79.95,68.39 81.09,68.39 82.2,67.28 | U1.8 50.1,49.47 72.26,49.47 74.68,51.88 74.8,51.94 | v113.54,44.51 113.54,44.45 113.47,44.32 | 78.99,67.44 63.88,82.55 63.75,82.61
  Bottom 0.3: v46.16,107.25 52.58,107.25 52.9,106.93 53.66,106.93 | v58.42,106.93 53.66,106.93 | v21.21,107.12 28.38,107.12 29.59,108.33 53.02,108.33 53.66,107.7 53.66,106.93 | v10.92,35.56 v13.4,35.56 13.46,35.69 13.46,35.94 13.97,36.45 25.4,36.45 28.16,33.69 | v41.21,10.48 41.21,16.57 v40.51,17.27 40.39,17.34 39.81,17.34 35.88,21.27 35.88,25.97 28.16,33.69 | v118.68,54.04 118.68,53.28 v116.14,50.74 116.08,50.61 113.54,48.07 v113.54,44.51 | v40.96,46.48 28.16,33.69
32KHZ
  Top 0.15: 76.68,54.64 75.44,53.4 75.44,53.09 U3.1 | 76.68,54.64 80.01,57.98 80.01,63.25 80.71,63.94 80.71,65.15 R2-PINH1.1 | 76.68,54.64 77.22,54.1 77.22,52.01 74.3,49.09 55.63,49.09 51.31,44.77 24.89,44.77 18.1,37.97 18.1,37.72 U2.9
DN
  Top 0.15: 162.12,53.78 162.31,53.59 162.88,53.59 J2.B7 | 162.12,53.78 162.12,54.29 162.37,54.55 162.88,54.55 J2.A7 | 162.12,53.78 156.59,53.78 153.42,50.61 151,50.61 D1.6
DP  (via drill 0.3)
  Top 0.15: J2.A6 162.94,54.1 163.51,54.1 163.7,54.29 163.7,54.8 163.51,54.99 162.94,54.99 J2.B6 162.88,54.99 v160.02,54.99 | v153.8,48.77 151,48.77 D1.4
  Bottom 0.15: v160.02,54.99 v153.8,48.77
EDP_3V3  (via drill 0.3)
  Top 0.127: v83.88,25.91 87.69,25.91 C7.1 | v62.48,25.91 58.67,29.72 L1.2
  Bottom 0.127: v62.48,25.91 v83.88,25.91
EPD_3V3  (via drill 0.3)
  Top 0.3: J1.15 53.85,14.61 53.4,14.61 J1.16 53.34,14.73 53.34,15.05 53.28,15.11 v53.28,15.37 53.34,15.49 53.34,15.88 55.12,17.65 57.78,17.65 62.04,21.91 63.5,21.91 EPD_C5.2 | v43.12,20.51 42.16,20.51 Q2.2 | v27.37,12.89 25.15,15.11 9.72,15.11 TP17.TP | v39.18,16.76 40.77,16.76 v41.91,17.91
  Bottom 0.3: v53.28,15.37 53.09,15.18 50.23,15.18 44.9,20.51 v43.12,20.51 43.05,20.38 41.91,19.24 v41.91,17.91 | v27.37,12.89 35.31,12.89 v39.18,16.76
EPD_3V3_C  (via drill 0.3)
  Top 0.3: R_CL1.2 46.04,18.35 42.16,22.23 42.16,22.42 Q2.1 42.1,22.61 v42.1,27.81 | v21.08,54.04 20.64,54.48 20.64,55.12 U2.18 | v56.64,70.61 59.44,73.41 TP13.TP
  Bottom 0.3: 28.67,61.63 37.66,70.61 v56.64,70.61 | 28.67,61.63 v21.08,54.04 | v42.1,27.81 42.1,30.67 49.66,38.23 49.66,46.23 34.73,61.15 29.15,61.15 28.67,61.63
EPD_BUSY  (via drill 0.3)
  Top 0.15: v55.94,13.27 56.83,14.16 56.83,14.54 J1.9 | v46.29,11.49 40.89,6.1 40.89,3.24 38.54,0.89 14.41,0.89 11.18,4.13 TP9.TP 11.11,4.19 7.24,8.06 7.24,42.93 10.41,46.1 10.41,55.12 U2.26
  Bottom 0.15: v55.94,13.27 48.07,13.27 v46.29,11.49
EPD_CS  (via drill 0.3)
  Top 0.15: v20.57,35.94 20.57,37.66 U2.11 | v12.7,33.78 12.7,31.43 9.53,28.26 TP10.TP 9.4,28.19 9.4,25.53 8.32,24.45 8.32,19.24 12.06,15.49 25.4,15.49 32.83,8.06 38.16,8.06 39.56,9.46 R9.1 39.62,9.53 41.27,11.18 v43.62,11.18 | v52.9,11.75 55.31,14.16 55.31,14.54 J1.12 | v103.25,36.32 103.5,36.07 104.08,36.07 D8.1
  Bottom 0.15: v20.57,35.94 14.86,35.94 v12.7,33.78 | v43.62,11.18 43.75,11.05 46.48,11.05 47.18,11.75 v52.9,11.75 76.01,11.75 100.58,36.32 v103.25,36.32
EPD_DC  (via drill 0.3)
  Top 0.15: v44.77,9.34 45.85,10.41 52.2,10.41 55.82,14.03 55.82,14.54 J1.11 | v17.84,15.94 12.06,15.94 8.7,19.3 8.7,23.11 9.53,23.94 TP11.TP 9.59,24 13.14,27.56 13.14,33.97 12.95,34.16 12.95,37.66 U2.5
  Bottom 0.15: v44.77,9.34 38.48,9.34 36.64,11.18 22.61,11.18 v17.84,15.94
EPD_RST  (via drill 0.3)
  Top 0.15: v55.37,17.14 56.33,16.19 56.33,14.61 J1.10 | v34.29,21.53 v36.39,21.53 | v6.03,4.76 5.08,3.81 TP12.TP | v7.68,39.88 7.68,42.93 16.76,52.01 16.76,55.12 U2.21
  Bottom 0.15: v55.37,17.14 49.66,17.14 45.28,21.53 v36.39,21.53 | 22.8,21.53 v34.29,21.53 | v6.03,4.76 22.8,21.53 | v7.68,39.88 7.68,36.58 22.73,21.53 22.8,21.53
FLASH_CS  (via drill 0.3)
  Top 0.15: U2.12 21.91,37.72 21.91,37.97 22.92,38.99 25.02,38.99 26.48,37.53 45.91,37.53 D9.1 45.91,37.59 45.91,38.29 v50.16,42.55 | v104.14,53.59 119.51,53.59 R5.1 | v44.77,51.94 42.23,49.4 U1.1
  Bottom 0.15: v104.14,53.59 91.95,53.59 84.2,61.34 76.2,61.34 69.79,54.93 47.75,54.93 v44.77,51.94 44.77,51.88 50.16,46.48 v50.16,42.55
GDR  (via drill 0.3)
  Top 0.15: v61.4,14.22 61.15,13.97 60.58,13.97 60.39,14.16 60.39,14.54 J1.2 60.39,14.61 60.39,14.99 v60.77,15.37 | v41.72,14.22 40.2,14.22 v39.24,13.27 | v34.86,11.94 33.85,10.92 Q3.1 | v96.84,51.82 96.84,53.15 90.04,59.94 90.04,62.48 R4.1 | v96.84,48.45 96.84,46.74 v74.87,24.77
  Bottom 0.15: v41.72,14.22 v61.4,14.22 | v39.24,13.27 36.2,13.27 v34.86,11.94 | v96.84,48.45 v96.84,51.82 | v74.87,24.77 70.17,24.77 v60.77,15.37
GND  (via drill 0.3, 0.35)
  Top 0.15: U2.29_1 12.38,43.69 12.38,44.9 U2.29_2 | U2.29_1 12.45,43.69 13.59,43.69 U2.29_4 13.65,43.69 14.86,43.69 U2.29_7 14.86,43.75 U2.29_8 | U2.29_2 12.45,44.9 13.59,44.9 U2.29_5 13.65,44.96 13.65,46.1 U2.29_6 13.72,46.1 14.86,46.1 U2.29_9 | 12.38,45.4 12.38,44.96 U2.29_2 | 12.38,45.4 12.38,46.1 U2.29_3 | U2.1 7.94,37.72 7.94,39.5 12.06,43.62 12.32,43.62 U2.29_1 | J4.G4 3.11,85.85 3.11,85.47 5.52,83.06 5.65,83.06 J4.P6 5.52,83 2.03,79.5 2.03,72.77 J4.G3 2.1,72.64 7.87,66.86 | 7.87,66.86 7.87,55.18 U2.28 | v10.79,45.4 12.38,45.4 | v7.94,48.26 7.94,55.12 U2.28 | C6.2 69.53,107.06 66.48,107.06 65.79,107.76 BOOT_BUTTON.2 65.72,107.82 62.29,107.82 BOOT_BUTTON.1 62.23,107.82 62.17,107.89 58.74,107.89 58.17,107.31 55.82,107.31 | CHANGE_BUTTON.1 47.31,107.89 50.74,107.89 CHANGE_BUTTON.2 50.8,107.82 v52.26,107.82 | 55.82,107.31 53.98,107.31 C10.2 53.91,107.31 53.78,107.44 v53.15,107.44 | 55.82,107.31 55.82,91.57 55.31,91.06 55.18,91.06 IC1.3 | v30.48,107.82 29.78,107.12 29.08,107.12 C5.2 29.02,107.12 26.48,107.12 25.78,107.82 RESET_BUTTON.2 25.72,107.89 22.29,107.89 RESET_BUTTON.1 22.23,107.82 22.23,102.68 10.73,91.19 D6.2 10.73,91.12 11.68,90.17 11.75,90.17 15.49,86.42 15.49,82.17 16.26,81.41 J4.G2 16.26,81.34 15.49,80.58 15.49,77.53 16.26,76.77 16.26,75.75 J4.G1 16.32,75.63 16.32,74.61 8.57,66.86 7.87,66.86 | J2.B1 162.94,57.4 162.94,57.59 J2.A12 162.88,57.72 162.88,58.8 163.45,59.37 J2.MP4 | J2.MP4 163.51,59.44 167.39,59.44 J2.MP2 167.39,59.37 167.39,49.28 J2.MP1 167.39,49.21 163.51,49.21 J2.MP3 | U4.4 127.57,49.28 127.89,49.28 128.59,49.97 U4.9
  Top 0.15: U4.9 128.65,49.97 128.84,49.78 129.48,49.78 U4.6 129.6,49.78 142.24,49.78 151.45,58.99 155.89,58.99 TP5.TP | U4.9 128.59,50.04 127.89,50.74 127.57,50.74 U4.1 127.51,50.74 v125.67,50.74 | TP4.TP 155.89,63.37 155.89,59.05 TP5.TP | J2.MP4 162.81,58.8 156.15,58.8 155.96,58.99 TP5.TP | 153.54,8.89 152.97,8.89 152.46,9.4 152.46,9.59 SENSOR2.7 152.46,9.34 152.02,8.89 151.32,8.89 151.13,9.08 151.13,10.16 151.64,10.67 151.64,12.51 SENSOR2.1 | 153.54,8.89 154.05,9.4 154.05,9.59 SENSOR2.5 | 158.69,4.51 155.45,4.51 C2.2 155.38,4.64 153.54,6.48 153.54,8.89 | 158.69,4.51 159.38,4.51 C9.2 | 158.69,4.51 158.69,2.79 158.88,2.6 159.89,2.6 164.4,7.11 164.4,17.78 J3.1 164.47,17.84 164.72,17.84 165.29,18.41 165.29,23.69 151.19,37.78 151.19,37.85 | J2.B12 162.94,51.24 162.94,50.99 J2.A1 162.94,50.93 162.94,49.72 163.45,49.21 J2.MP3 | D1.2 148.4,49.66 148.02,50.04 144.15,50.04 R2-USB.2 144.15,49.97 141.1,46.93 141.1,41.66 144.91,37.85 151.19,37.85 | 151.19,37.85 151.57,38.23 151.57,43.18 C4_USB.2 151.64,43.24 151.64,45.91 C5_USB.2 151.64,45.97 154.62,48.96 154.62,49.47 R2-USB1.1 154.75,49.47 155,49.72 162.88,49.72 J2.MP3 | MCP73831.2 107.5,36.58 107.76,36.58 108.33,36.01 108.33,28.64 109.67,27.3 109.67,27.11 R2_BAT.1 109.73,27.3 118.94,36.51 C_DELAY.2 118.94,36.58 118.94,39.94 118.3,40.58 115.57,40.58 | 115.57,40.58 115.57,36.7 C3.- | 115.57,40.58 115.57,43.12 111.51,47.18 110.55,47.18 C1_BAT2.2 110.49,47.24 109.79,47.94 108.84,47.94 104.14,43.24 | 104.14,43.24 104.14,38.04 | 104.14,38.04 104.14,37.59 D8.2 | 114.3,49.66 113.79,49.15 113.67,49.15 IC4.2
  Top 0.15: 114.3,49.66 114.3,50.42 114.11,50.61 110.55,50.61 110.49,50.55 C1_BAT1.2 | 99.38,52.26 99.38,51.44 99.63,51.18 102.62,51.18 103.19,51.75 115.76,51.75 117.09,50.42 117.09,50.04 | 99.38,52.26 99.38,54.23 90.04,63.56 90.04,63.82 R4.2 | 117.09,50.04 117.09,49.66 116.97,49.53 114.49,49.53 114.36,49.66 114.3,49.66 | v94.87,52.26 93.22,52.26 C10_SUPERCAP.1 | v99.31,52.26 99.38,52.26 | v79.57,60.9 79.38,61.09 79.38,62.29 U3.13 | v99.38,47.75 99.69,47.75 104.14,43.31 104.14,43.24 | EPD_C9.1 67.94,21.53 71.88,21.53 72.14,21.78 EPD_C7.1 72.2,21.78 72.58,21.4 74.36,21.4 | 74.36,21.4 76.07,21.4 EPD_C8.1 76.07,21.46 79.44,24.83 79.44,26.92 D3.1 79.5,26.99 80.58,26.99 91.63,38.04 104.14,38.04 | EPD_C10.1 48.01,21.72 48.01,21.84 47.37,22.48 47.37,23.43 47.5,23.56 50.61,23.56 52.39,21.78 EPD_C2.1 52.51,21.78 v54.55,21.78 | 59.4,17.37 62.67,20.64 63.5,20.64 EPD_C5.1 63.56,20.64 63.75,20.45 64.2,20.45 | 59.4,17.37 57.4,15.37 57.4,14.61 J1.8 | 59.4,17.37 61.85,14.92 61.85,12.13 J1.MP1 | 64.2,20.45 74.36,20.45 | 74.36,20.45 77.79,20.45 84.52,27.18 87.69,27.18 C7.2 | 64.2,20.45 64.2,22.42 64.07,22.54 62.17,22.54 60.9,21.27 59.82,21.27 EPD_C6.1 59.75,21.21 59.69,21.14 56.2,21.14 EPD_C12.1 56.07,21.14 v55.18,21.14 55.18,18.22 52.83,15.88 52.83,14.61 J1.17 52.83,14.54 52.83,14.1 50.86,12.13 48.39,12.13 J1.MP2 48.32,12.06 46.23,12.06 46.04,11.87 44.07,11.87 | v74.36,21.21 74.36,21.4 | v74.36,20.32 74.36,20.45 | C1.2 51.5,37.53 51.24,37.53 50.61,36.89 48.07,36.89 47.5,37.47 D9.2 47.37,37.53 v47.37,39.12 | 44.01,45.59 44.26,45.59 46.1,47.43 U1.9 | 44.01,45.59 42.23,45.59 U1.4
  Top 0.15: v44.01,45.53 44.01,45.59 | 34.67,35.62 32.96,35.62 D11.2 32.83,35.62 32.7,35.5 29.59,35.5 D12.2 29.53,35.43 v27.56,33.47 | 34.67,35.62 36.32,35.62 D10.2 36.39,35.69 v43.88,35.69 | 34.67,30.86 32.64,30.86 32.51,30.99 C8.2 32.38,30.99 29.78,30.99 C1_BAT.2 29.78,30.92 29.08,30.23 29.08,26.1 34.35,20.83 34.99,20.83 R1_PWRUSB.1 35.05,20.77 35.05,15.24 | 34.67,30.86 35.62,30.86 C2_BAT.2 | 34.67,30.86 34.67,35.62 | SJ1.1 32.32,1.91 32.32,2.1 35.18,4.95 40.2,4.95 R2.1 40.26,5.02 40.26,7.18 44.07,10.99 44.07,11.87 | 44.07,11.87 41.08,11.87 EPD_C1.1 40.96,11.81 38.48,11.81 EPD_C11.1 38.42,11.75 36.83,10.16 36.39,10.16 36.13,10.41 36.13,11.3 35.05,12.38 35.05,15.24 | 117.09,50.04 v117.28,50.04 | v36.89,15.24 37.53,14.61 38.42,14.61 v38.42,14.55 | v35.12,15.24 35.05,15.24 | v27.81,109.16 27.11,109.16 27.11,109.22 27.81,109.22 27.88,109.16 27.88,109.09 27.05,109.09 27.05,109.28 27.81,109.28 28,109.09 28,109.03 26.99,109.03 26.99,109.35 27.81,109.35 28.13,109.03 28.13,108.97 26.92,108.97 26.92,109.41 27.81,109.41 28.19,109.03 28.19,108.9 26.86,108.9 26.86,109.47 27.81,109.47 28.26,109.03 28.26,108.84 26.86,108.84 26.8,108.9 26.8,109.54 27.81,109.54 28.32,109.03 28.32,108.78 26.86,108.78 26.73,108.9 26.73,109.6 27.81,109.6 28.45,108.97 29.59,108.97 29.72,108.84 29.72,108.14 29.78,108.14 29.78,108.84 29.59,109.03 28.45,109.03 28.38,108.97 28.38,108.71 26.86,108.71 26.67,108.9 26.67,109.67 46.29,109.67 46.29,108.9 44.83,108.9 44.51,109.22 43.37,109.22 43.24,109.09 43.24,108.39 42.93,108.08 42.93,87 42.55,87 42.35,86.81 42.35,86.49 12,56.13 8.7,56.13 8.51,56.33 8,56.33 8,55.18 7.94,55.18 U2.28
  Top 0.15: v37.4,64.52 44.32,57.59 v44.37,57.59 | v6.6,67.06 2.6,71.06 2.6,71.12 2.67,71.12 6.67,67.12 6.67,66.99 6.6,66.99 2.48,71.12 2.48,71.18 2.67,71.18 6.73,67.12 6.73,66.86 6.67,66.86 2.35,71.18 2.35,71.25 2.67,71.25 6.79,67.12 6.79,66.74 6.73,66.74 2.22,71.25 2.22,71.31 2.67,71.31 6.86,67.12 6.86,66.61 6.79,66.61 2.1,71.31 2.1,71.37 2.67,71.37 6.92,67.12 6.92,66.48 6.86,66.48 1.97,71.37 1.97,71.44 2.67,71.44 6.99,67.12 6.99,66.36 6.92,66.29 1.78,71.44 1.84,71.5 2.67,71.5 7.05,67.12 7.05,56.2 7.11,56.13 7.11,55.24 7.62,55.24 7.62,55.37 7.75,55.37 7.75,55.18 7.05,55.18 7.05,56.13 7.24,56.33 7.62,56.33 7.62,56.01 7.75,56.01 7.75,66.48 2.67,71.56 2.6,71.56 2.54,71.63 2.54,71.69 2.35,71.69 2.35,71.56 2.54,71.56 2.67,71.69 2.92,71.69 2.98,71.63 2.98,71.56 2.73,71.56 2.29,72.01 2.29,72.2 2.16,72.33 2.16,72.39 2.1,72.39 2.03,72.33 1.97,72.33 1.97,72.01 2.16,72.01 2.16,72.26 1.97,72.45 1.97,72.58 2.03,72.58 2.1,72.52 1.59,72.01 1.59,71.94 1.65,71.94 1.71,71.88 1.71,71.82 1.78,71.82 1.78,71.88 1.84,71.88 1.91,71.82 1.78,71.69 1.78,71.63 2.22,71.63 2.22,71.88 1.91,71.88 1.71,71.69 1.71,71.63 1.78,71.56 2.29,71.56 2.29,71.94 1.71,71.94 1.59,71.82 1.52,71.88 1.46,71.88 1.4,71.82 1.59,71.63 1.65,71.69 1.65,71.82 1.52,71.94 1.46,71.94 1.4,71.88 6.99,66.29 6.99,55.12 7.87,55.12 U2.28 | v8.45,69.85 5.02,69.85 2.98,71.88 3.17,72.07 3.43,72.07 3.43,73.6 3.17,73.85 2.16,73.85 2.16,72.71 2.29,72.58 3.37,72.58 3.37,73.6 3.17,73.79 5.97,76.58 7.05,76.58 12.13,71.5 12.13,71.18 12.32,70.99 12.57,70.99 12.57,71.06 12.32,71.06 12.19,71.18 8,66.99 7.87,66.99 5.14,69.72 5.14,69.79 10.73,69.79 12.06,71.12 12.06,71.5 7.05,76.52 5.97,76.52 5.91,76.58 4.89,76.58 4.32,77.15 4.32,81.34 4.89,81.92 4.89,82.17 4.83,82.17 4.83,81.92 4.89,81.85 4.38,81.34 4.38,77.15 4.89,76.64 2.22,73.98 2.16,73.98 2.16,79.5 4.7,82.04 4.76,82.04 4.76,81.85 2.22,79.31 2.22,74.04 2.35,73.91 3.24,73.91 5.78,76.45 5.78,76.52 4.83,76.52 2.29,79.06 2.29,79.31 2.22,79.38 2.22,79.5 4.64,81.92 4.7,81.92 4.7,81.85 2.29,79.44 4.25,77.47 4.25,77.15 2.29,75.18 2.29,74.11 2.41,73.98 3.24,73.98 5.65,76.39 5.65,76.45 4.76,76.45 2.29,78.93 2.29,78.99 4.25,80.96 4.25,81.22 4.19,81.22 2.41,79.44 2.41,79.38 2.35,79.31 2.35,79.12 4.19,77.28 4.19,77.22 2.29,75.31 2.29,75.25 3.37,74.17 3.24,74.04 2.41,74.04 2.41,74.11 2.35,74.17 2.35,75.12 4.32,77.09 4.76,76.64 2.41,74.3 2.41,74.23 2.54,74.11 3.24,74.11 5.46,76.33 5.46,76.39 4.7,76.39 2.29,78.8 2.29,78.87 4.25,80.83 4.25,80.9 4.13,81.03 4.06,81.03 2.48,79.44 2.48,79.31 2.41,79.25 2.41,79.18 4.19,77.41 4.19,77.34 2.29,75.44 2.29,75.37 3.43,74.23 5.46,76.26 5.4,76.33 4.64,76.33 2.29,78.68 2.29,78.74 4.25,80.71 4.25,80.77 4.06,80.96 2.54,79.44 2.54,79.31 4.25,77.6 4.25,77.53 2.29,75.56 2.29,75.5 3.43,74.36 5.27,76.2 5.27,76.26 4.57,76.26 2.29,78.55 2.29,78.61 4.25,80.58 4.25,80.64 4.06,80.83 4,80.83 2.6,79.44 2.6,79.38 4.25,77.72 4.25,77.66 2.29,75.69 2.29,75.63 3.43,74.49 3.49,74.49 5.14,76.14 5.14,76.2 4.51,76.2 2.29,78.42 2.29,78.49 4.25,80.45 4.25,80.52 4,80.77 2.67,79.44 4.25,77.85 4.25,77.79 2.29,75.82 2.29,75.75 3.49,74.55 5.02,76.07 5.02,76.14 4.45,76.14 2.29,78.3 2.29,78.36 4.25,80.33 4.25,80.39 4,80.64 2.79,79.44 4.25,77.98 4.25,77.92 2.29,75.95 2.29,75.88 3.49,74.68 3.56,74.68 4.89,76.01 4.89,76.07 4.38,76.07 2.29,78.17 2.29,78.23 4.25,80.2 4.25,80.26 4,80.52 2.92,79.44 4.25,78.11 4.25,78.04 2.29,76.07 2.29,76.01 3.56,74.74 4.76,75.95 4.76,76.01 4.32,76.01 2.29,78.04 2.29,78.11 4.25,80.07 4.25,80.14 4,80.39 3.05,79.44 4.25,78.23 4.25,78.17 2.29,76.2 2.29,76.14 3.56,74.87 3.62,74.87 4.64,75.88 4.64,75.95 4.25,75.95 2.29,77.92 2.29,77.98 4.25,79.95 4.25,80.01 4,80.26 3.17,79.44 4.25,78.36 4.25,78.3 2.29,76.33 2.29,76.26 3.62,74.93 4.51,75.82 4.51,75.88 4.19,75.88 2.29,77.79 2.29,77.85 4.25,79.82 4.25,79.88 4,80.14 3.3,79.44 4.25,78.49 4.25,78.42 2.29,76.45 2.29,76.39 3.62,75.06 3.68,75.06 4.38,75.75 4.38,75.82 4.13,75.82 2.29,77.66 2.29,77.72 4.25,79.69 4.25,79.76 4,80.01 3.43,79.44 4.25,78.61 4.25,78.55 2.29,76.58 2.29,76.52 3.68,75.12 4.25,75.69 4.25,75.75 4.06,75.75 2.29,77.53 2.29,77.6 4.25,79.57 4.25,79.63 4,79.88 3.56,79.44 4.25,78.74 4.25,78.68 2.29,76.71 2.29,76.64 3.68,75.25 3.75,75.25 4.13,75.63 4.13,75.69 4,75.69 2.29,77.41 2.29,77.47 4.25,79.44 4.25,79.5 4,79.76 3.68,79.44 4.25,78.87 4.25,78.8 2.29,76.83 2.29,76.77 3.75,75.31 4,75.56 4,75.63 3.94,75.63 2.29,77.28 2.29,77.34 4.25,79.31 4.25,79.38 4,79.63 3.81,79.44 4.25,78.99 4.25,78.93 2.29,76.96 2.29,76.9 3.75,75.44 3.81,75.44 3.87,75.5 3.87,75.56 2.29,77.15 2.29,77.22 4.25,79.18 4.25,79.25 4,79.5 3.94,79.44 4.25,79.12 4.25,79.06 2.29,77.09 2.29,77.03 3.62,75.69 3.68,75.69 4.64,76.64 4.32,76.96 2.41,75.06 2.41,74.36 2.6,74.17 3.24,74.17 3.24,74.23 2.92,74.55 2.86,74.55 2.48,74.93 2.48,74.99 4.32,76.83 4.51,76.64 2.48,74.61 2.48,74.42 2.67,74.23 3.11,74.23 3.11,74.3 2.92,74.49 2.79,74.49 2.48,74.8 2.48,74.87 4.32,76.71 4.38,76.64 2.48,74.74 2.48,74.68 2.86,74.3 2.98,74.3 2.98,74.36 2.92,74.42 2.79,74.42 2.73,74.36 2.67,74.36 2.54,74.49 2.54,74.55 v3.62,75.63
  Top 0.15: v4.76,83.69 4.7,83.69 4.51,83.5 4.51,82.49 4.7,82.3 4.95,82.55 4.57,82.93 4.57,83.5 4.7,83.63 4.83,83.63 4.95,83.5 4.95,83.44 4.64,83.12 4.64,82.93 4.57,82.87 4.57,82.49 4.7,82.36 1.21,78.87 1.21,73.53 1.33,73.53 1.33,73.85 1.27,73.91 1.27,78.87 1.21,78.93 1.21,85.53 1.97,86.3 2.03,86.23 2.03,85.6 1.65,85.6 1.65,85.92 1.91,86.17 1.97,86.17 1.97,85.66 1.71,85.66 v1.71,85.85 | v4.13,74.68 8.83,74.68 12,71.5 12,71.12 10.73,69.85 8.51,69.85 3.94,74.42 3.87,74.42 3.3,73.85 3.3,73.79 7.18,69.91 8.38,69.91 10.92,72.45 10.92,72.52 8.83,74.61 4.06,74.61 3.94,74.49 8.38,70.04 8.32,69.98 7.18,69.98 3.37,73.79 3.37,73.85 3.87,74.36 3.94,74.36 8.19,70.1 8.19,70.04 7.18,70.04 3.43,73.79 3.43,73.85 3.87,74.3 3.94,74.3 8.06,70.17 8.06,70.1 7.18,70.1 3.49,73.79 3.49,73.85 3.87,74.23 3.94,74.23 7.94,70.23 7.94,70.17 7.18,70.17 3.56,73.79 3.56,73.85 3.87,74.17 3.94,74.17 7.81,70.29 7.81,70.23 7.18,70.23 3.62,73.79 v3.62,73.85 | v1.21,88.58 0.38,88.58 0.38,110.81 20,110.81 20,109.6 21.34,109.6 21.34,108.9 21.21,108.78 20.07,108.78 20.07,108.97 20,109.03 18.73,109.03 18.61,108.9 18.61,107.95 18.86,107.7 20,107.7 20.19,107.5 20.95,107.5 21.46,108.01 21.46,108.14 20.07,108.14 20.07,107.89 19.94,107.76 18.86,107.76 18.67,107.95 18.67,108.9 18.73,108.97 20,108.97 20.57,109.54 21.27,109.54 21.27,108.9 21.21,108.84 20.13,108.84 20.13,109.03 18.41,110.74 0.45,110.74 0.45,88.65 2.6,88.65 2.67,88.71 2.67,88.77 2.54,88.9 2.41,88.9 2.03,89.28 2.03,90.55 2.41,90.93 2.41,91.63 2.54,91.76 3.68,91.76 3.87,91.57 3.87,90.68 3.62,90.42 2.92,90.42 2.92,90.49 2.98,90.55 3.68,90.55 3.81,90.68 3.81,91.57 3.68,91.69 2.54,91.69 2.48,91.63 0.51,93.6 0.51,110.68 18.41,110.68 18.48,110.74 19.94,110.74 19.94,109.28 19.75,109.09 0.57,109.09 0.57,110.62 18.48,110.62 18.54,110.68 19.88,110.68 19.88,109.35 19.68,109.16 0.64,109.16 0.64,110.55 18.54,110.55 18.61,110.62 19.81,110.62 19.81,109.41 19.62,109.22 0.7,109.22 0.7,110.49 18.61,110.49 18.67,110.55 19.75,110.55 19.75,109.47 19.56,109.28 0.76,109.28 0.76,110.43 18.67,110.43 18.73,110.49 19.68,110.49 19.68,109.54 19.49,109.35 0.83,109.35 0.83,110.36 18.73,110.36 18.8,110.43 19.62,110.43 19.62,109.6 19.43,109.41 0.89,109.41 0.89,110.3 18.8,110.3 18.86,110.36 19.56,110.36 19.56,109.67 19.37,109.47 0.95,109.47 0.95,110.24 18.86,110.24 18.92,110.3 19.49,110.3 19.49,109.73 19.3,109.54 1.02,109.54 1.02,110.17 18.92,110.17 18.99,110.24 19.43,110.24 19.43,109.79 19.24,109.6 1.08,109.6 1.08,110.11 18.99,110.11 19.05,110.17 19.37,110.17 19.37,109.86 19.18,109.67 1.14,109.67 1.14,110.05 19.05,110.05 19.11,110.11 19.3,110.11 19.3,109.92 19.11,109.73 1.21,109.73 1.21,109.98 19.11,109.98 19.18,110.05 19.24,110.05 19.24,109.98 19.05,109.79 1.27,109.79 1.27,109.92 19.11,109.92 19.94,109.09 20,109.09 20.38,109.47 20.38,109.54 20,109.54 20,109.22 19.88,109.09 19.81,109.09 19.05,109.86 v1.33,109.86